# Altium PCB Optocouplers.PcbDoc (part 1 of 2)
Units mm, origin at the board's own origin, x right, y up, seen from the top; angles counter-clockwise.
Board outline 43.2 x 24.15 mm, 4 copper layers (Top Layer, Layer 1, Layer 2, Bottom Layer), stack 1.553 mm thick; 116 components, 82 nets, 391 pads, 180 vias.
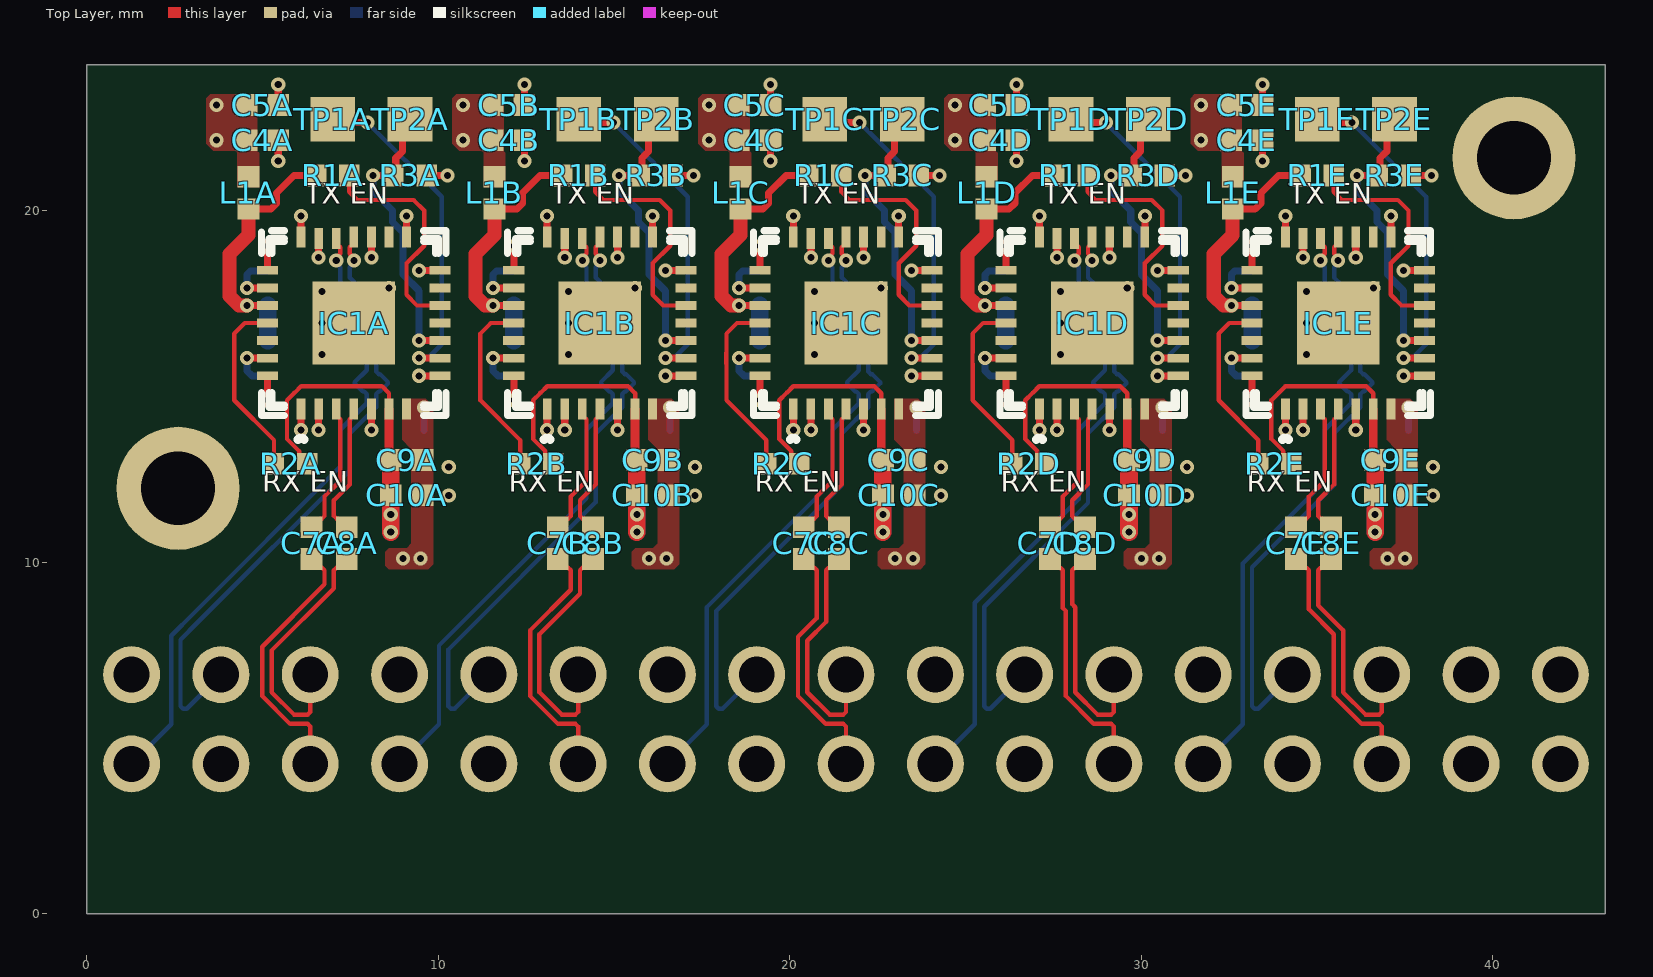
[diagram p0: Top Layer view]
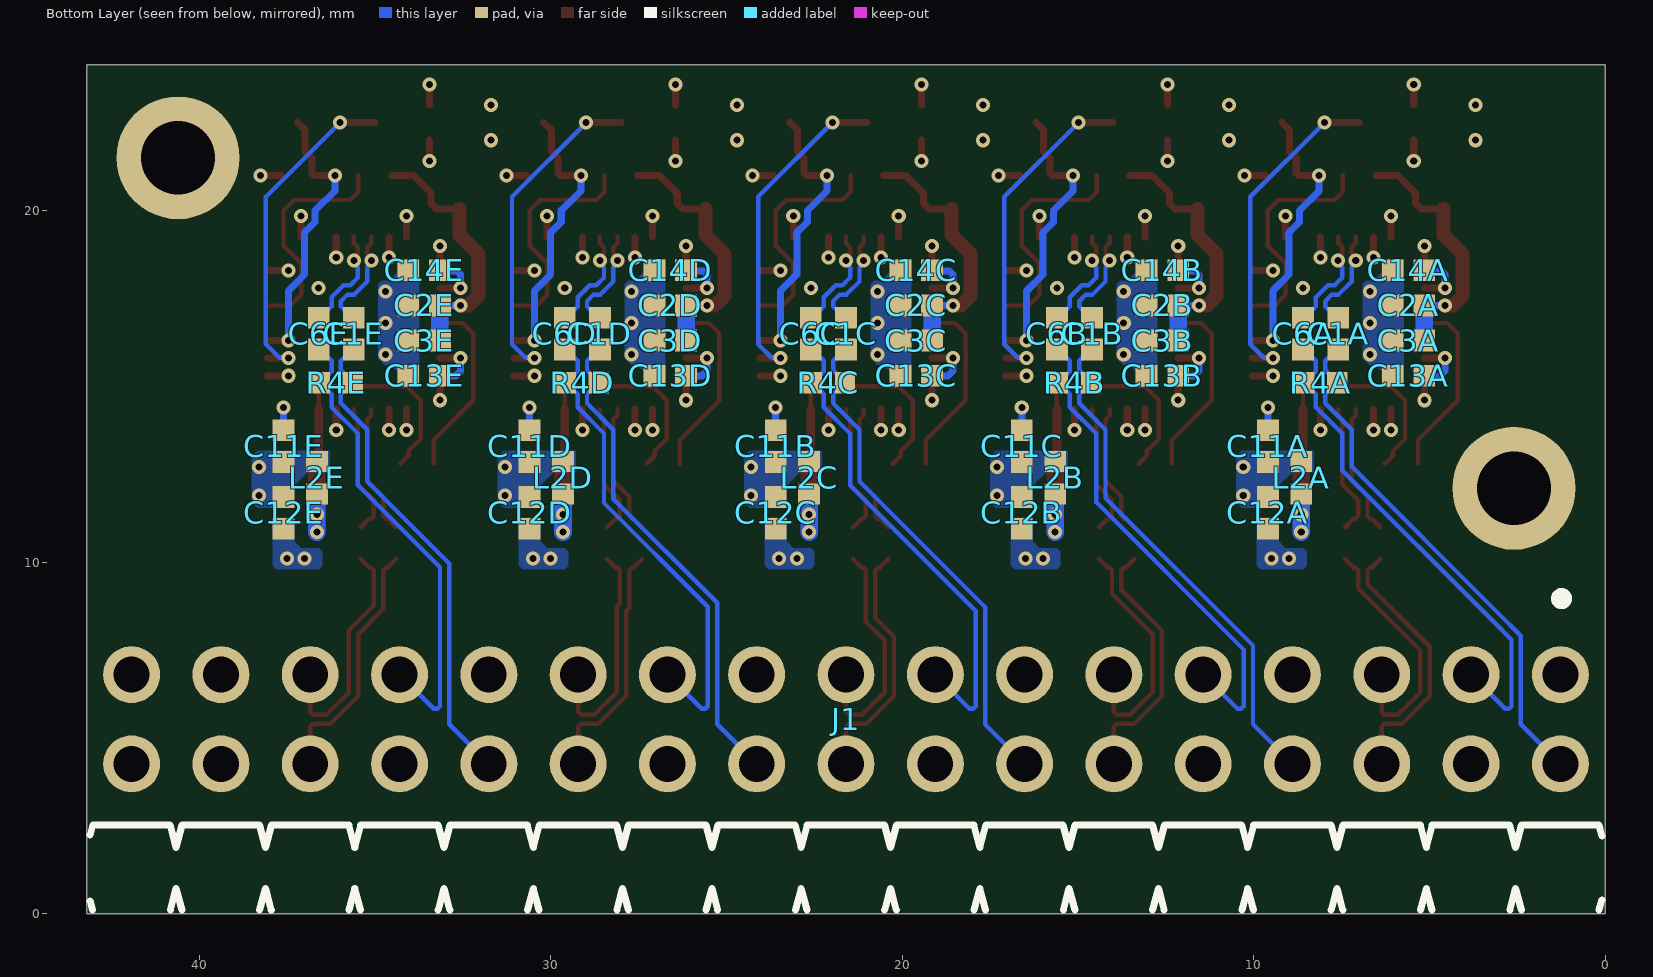
[diagram p1: Bottom Layer view, seen from below]
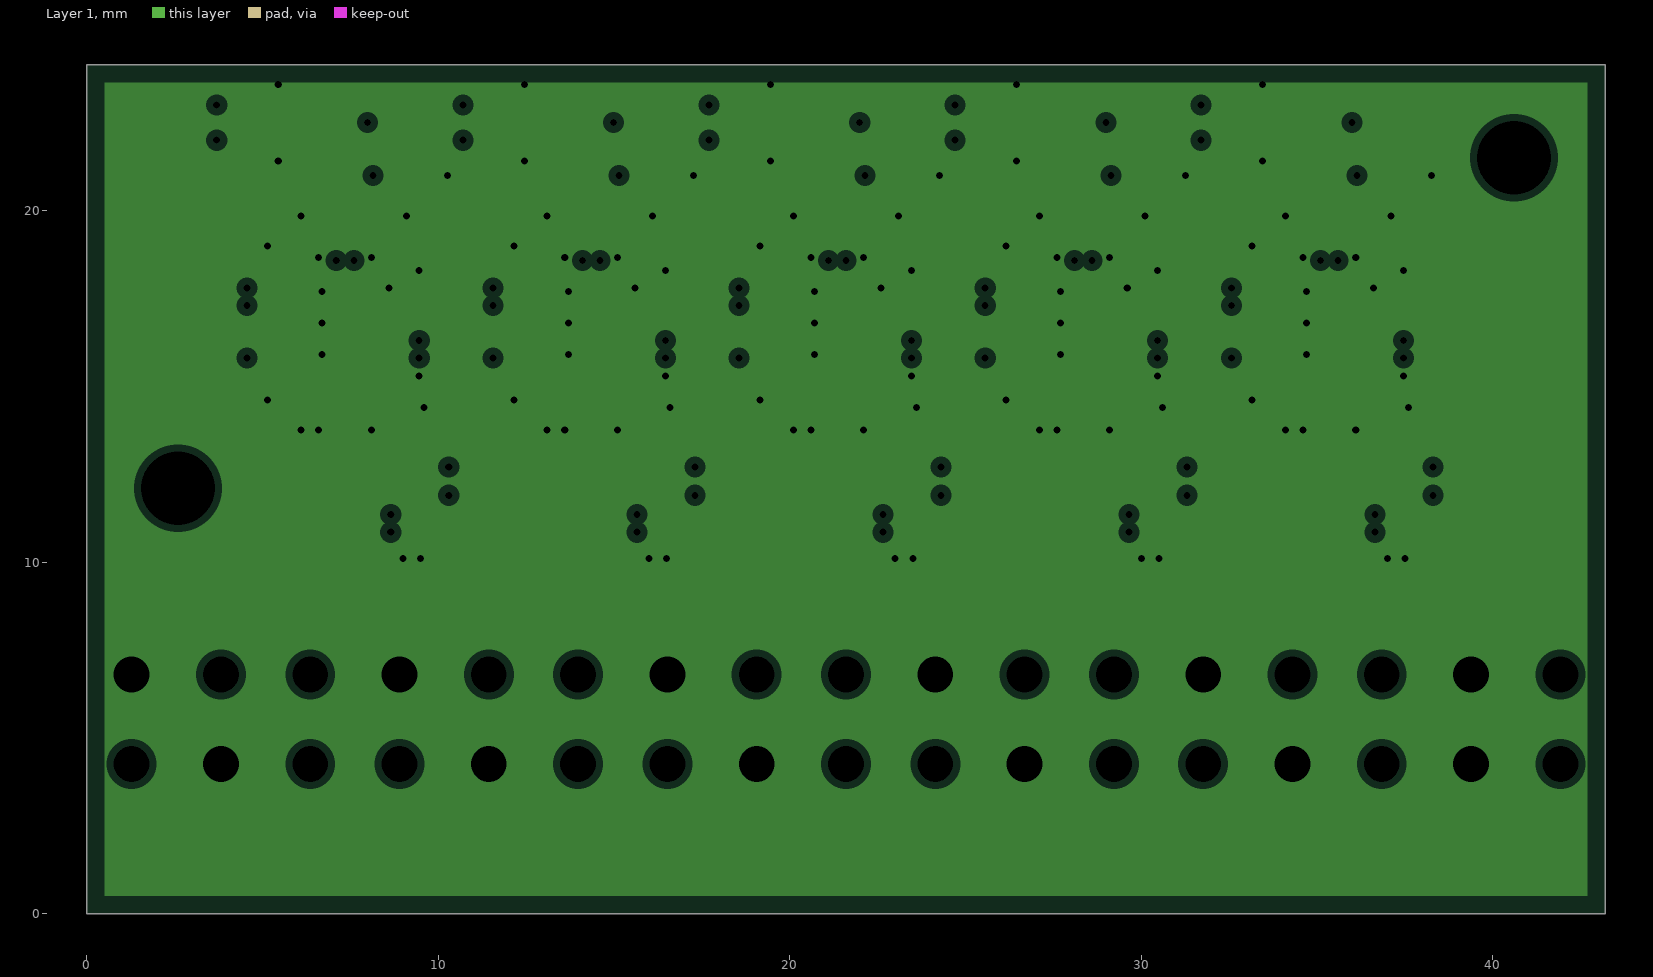
[diagram p2: Layer 1, clearances drawn from the general rule]
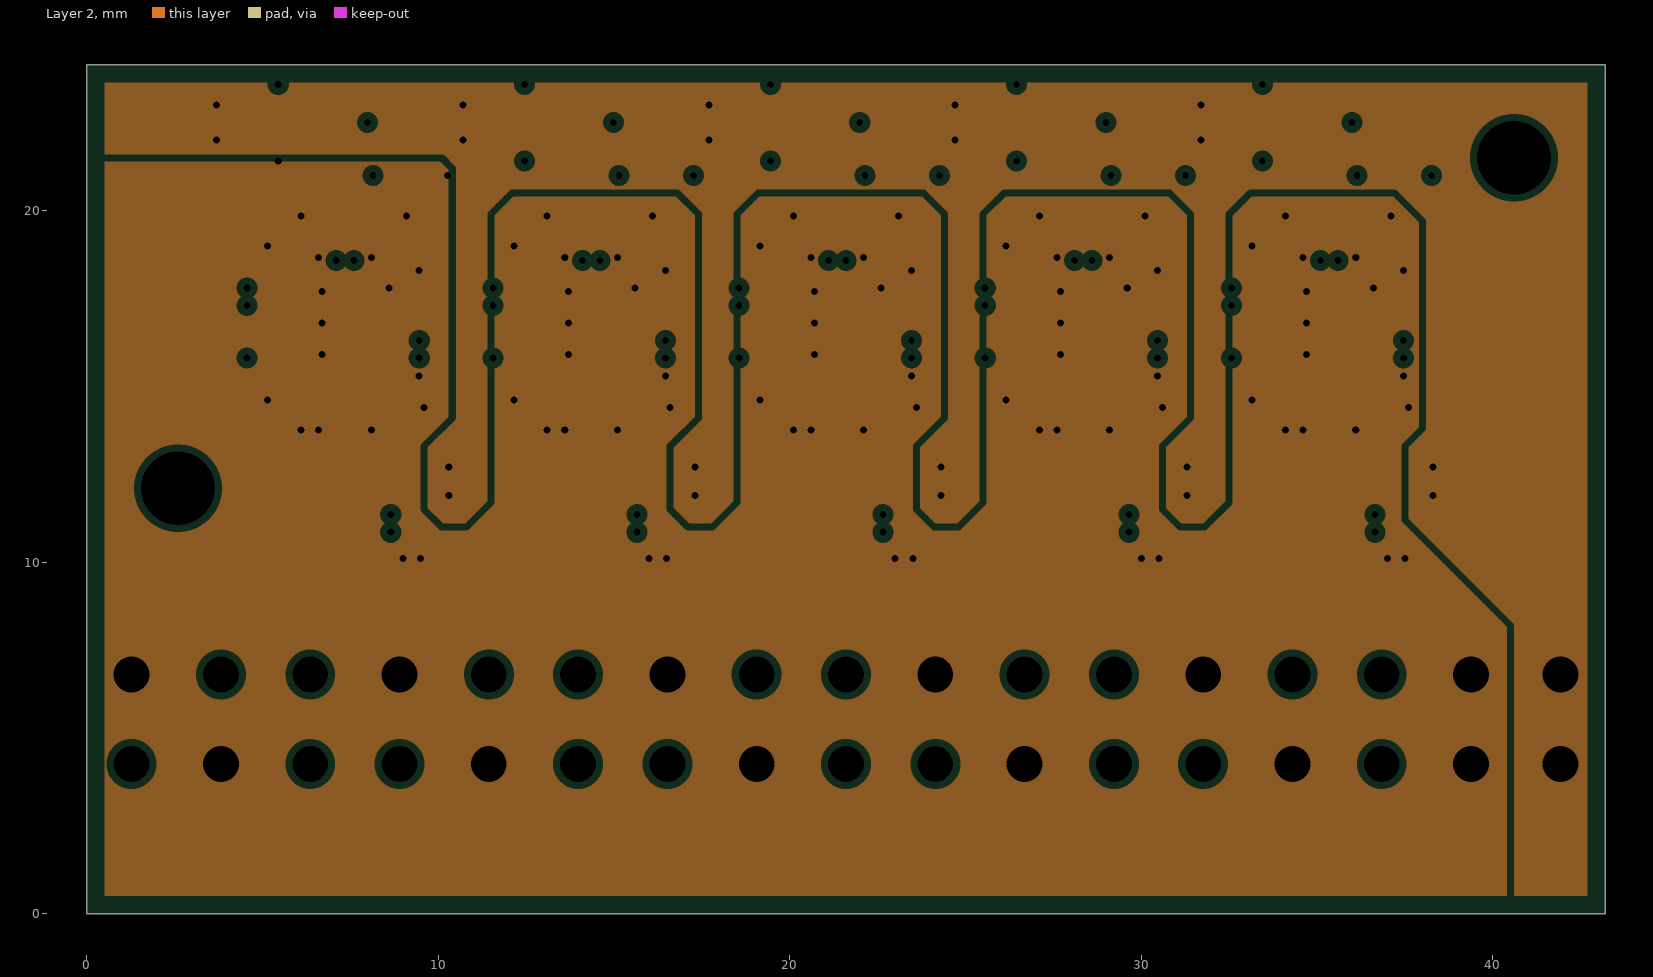
[diagram p3: Layer 2, clearances drawn from the general rule]
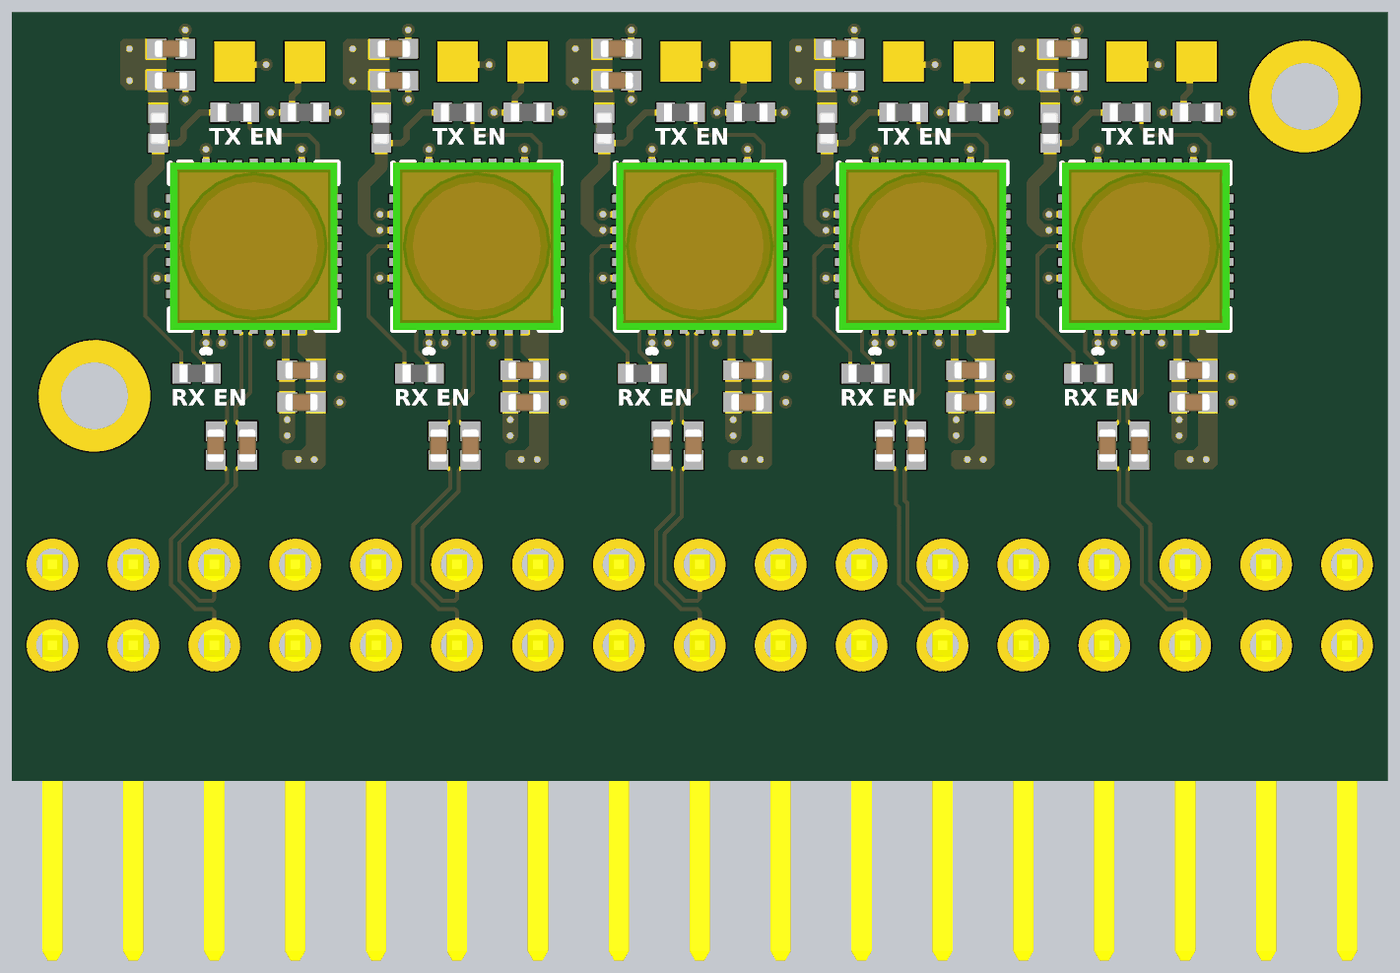
[diagram p5: 3D render of the assembled board from above, using the file's embedded part models]
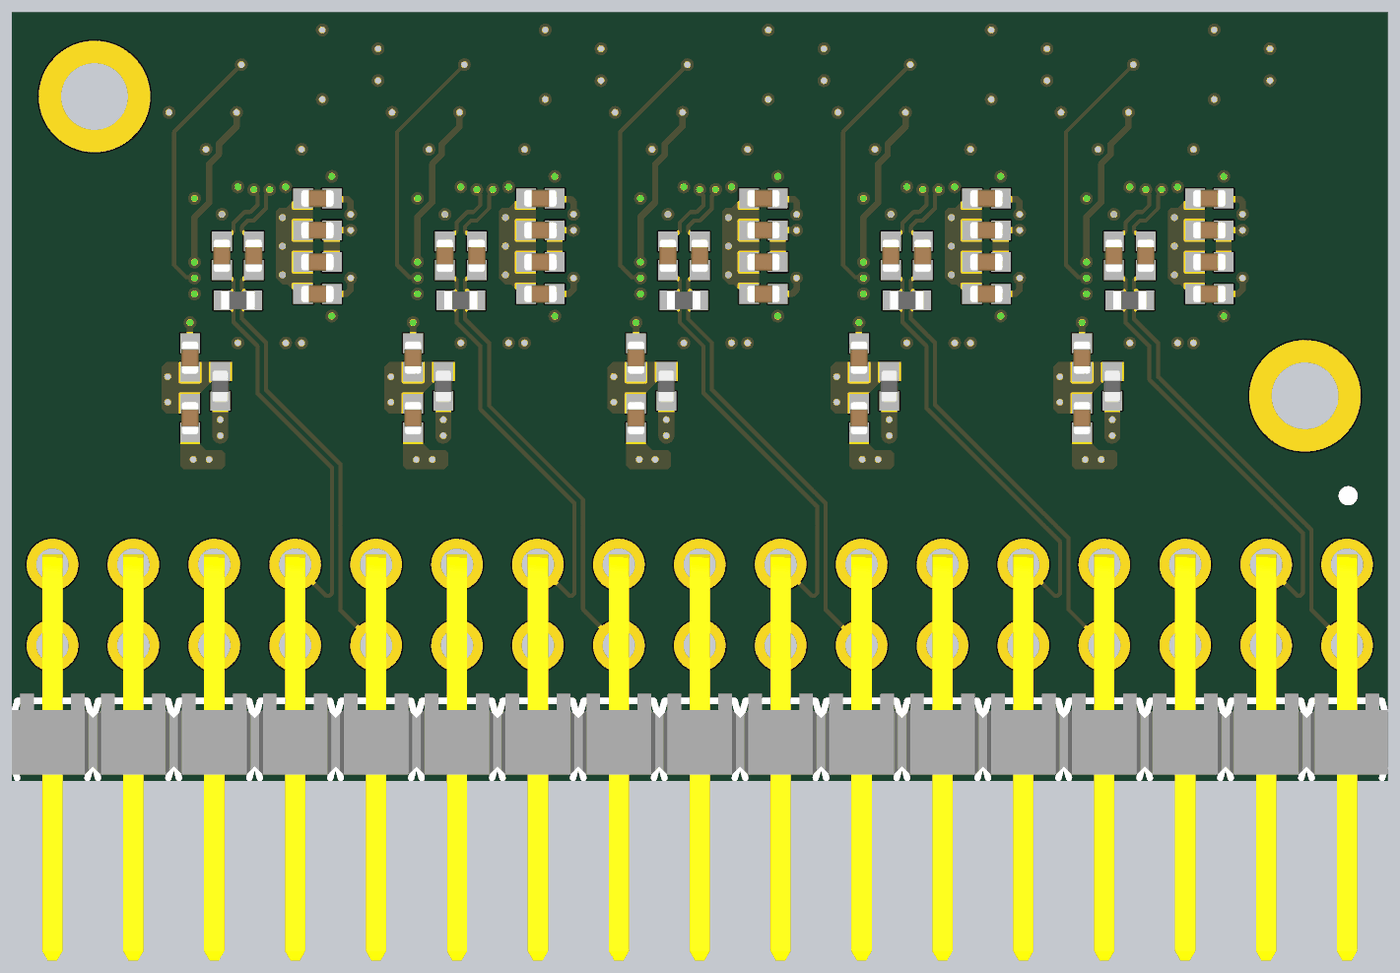
[diagram p6: 3D render of the assembled board from below, using the file's embedded part models]

## Layer stack, top to bottom
Top Solder: solder mask 0.025, Solder Resist, Dk 3.7
Top Layer: signal copper 0.04
Prepreg 1: prepreg 0.0681, PP-006, Dk 4.3
Prepreg 2: prepreg 0.0681, PP-006, Dk 4.3
Layer 1: plane copper 0.035, net GND
Core: dielectric 1.13, FR-4, Dk 4.6
Layer 2: plane copper 0.035, net GND
Prepreg 3: prepreg 0.0681, PP-006, Dk 4.3
Prepreg 4: prepreg 0.0681, PP-006, Dk 4.3
Bottom Layer: signal copper 0.04
Bottom Solder: solder mask 0.025, Solder Resist, Dk 3.7

## Board outline
0,0 0,24.15 43.2,24.15 43.2,0

## Design rules (kind name [scope] priority, off if disabled: settings)
Clearance [All] p1: gap=0.1 ignorepadtopadclearanceinfootprint=FALSE
DiffPairsRouting [All] p1: maxlimit=0.14 minlimit=0.14 mostfreqgap=0.14 toplayer_minwidth=0.125 toplayer_maxwidth=0.125 toplayer_prefwidth=0.125 bottomlayer_minwidth=0.125 bottomlayer_maxwidth=0.125 bottomlayer_prefwidth=0.125 impedanceprofiledriven=TRUE impedanceprofileid={B02402C6-B621-4C1F-966D-6B71089D347F} impedanceprofilevalue=100.000000 maxuncoupledlength=12.7
MinimumSolderMaskSliver [All] p1: minsoldermaskwidth=0.1
PlaneClearance [All] p1: clearance=0.2
PlaneConnect [All] p1: planeconnectstyle=Direct reliefexpansion=0.508 reliefentries=4 reliefconductorwidth=0.254 reliefairgap=0.254
PolygonConnect [All] p1: connectstyle=Direct reliefconductorwidth=0.254 reliefentries=4 polygonreliefangle="90 Angle" airgapwidth=0.254
RoutingVias [All] p1: holewidth=0.2 width=0.4 viastyle="Through Hole" minholewidth=0.2 minwidth=0.4 maxholewidth=0.711 maxwidth=1.27
SolderMaskExpansion [All] p1: expansion=0.05 istentingtop=FALSE
SupplyNets "Schematic Supply Nets_1" [InNet('P3V3')] p1: voltage=0.000
SupplyNets "Schematic Supply Nets" [InNet('GND')] p2: voltage=0.000
Width [All] p1: maxlimit=3 minlimit=0.1 preferedwidth=0.1
26 further rules are at their usual default settings.

## Classes and differential pairs
component class Optocoupler_module: J1
component class U_Optocoupler5: C1E C2E C3E C4E C5E C6E C7E C8E C9E C10E C11E C12E C13E C14E IC1E L1E L2E R1E R2E R3E R4E TP1E TP2E
channel class Optocoupler: U_Optocoupler1 U_Optocoupler2 U_Optocoupler3 U_Optocoupler4 U_Optocoupler5
net class D100: RX_1_N RX_1_P RX_2_N RX_2_P RX_3_N RX_3_P RX_4_N RX_4_P RX_5_N RX_5_P RX_CA_N RX_CA_P RX_CB_N RX_CB_P RX_CC_N RX_CC_P RX_CD_N RX_CD_P RX_CE_N RX_CE_P TX_1_N TX_1_P TX_2_N TX_2_P TX_3_N TX_3_P TX_4_N TX_4_P TX_5_N TX_5_P TX_CA_N TX_CA_P TX_CB_N TX_CB_P TX_CC_N TX_CC_P TX_CD_N TX_CD_P TX_CE_N TX_CE_P
component class U_Optocoupler2: C1B C2B C3B C4B C5B C6B C7B C8B C9B C10B C11B C12B C13B C14B IC1B L1B L2B R1B R2B R3B R4B TP1B TP2B
component class U_Optocoupler4: C1D C2D C3D C4D C5D C6D C7D C8D C9D C10D C11D C12D C13D C14D IC1D L1D L2D R1D R2D R3D R4D TP1D TP2D
component class U_Optocoupler3: C1C C2C C3C C4C C5C C6C C7C C8C C9C C10C C11C C12C C13C C14C IC1C L1C L2C R1C R2C R3C R4C TP1C TP2C
component class U_Optocoupler1: C1A C2A C3A C4A C5A C6A C7A C8A C9A C10A C11A C12A C13A C14A IC1A L1A L2A R1A R2A R3A R4A TP1A TP2A
differential pair TX_5: +TX_5_P -TX_5_N
differential pair TX_4: +TX_4_P -TX_4_N
differential pair TX_3: +TX_3_P -TX_3_N
differential pair TX_2: +TX_2_P -TX_2_N
differential pair TX_1: +TX_1_P -TX_1_N
differential pair RX_5: +RX_5_P -RX_5_N
differential pair RX_4: +RX_4_P -RX_4_N
differential pair RX_3: +RX_3_P -RX_3_N
differential pair RX_2: +RX_2_P -RX_2_N
differential pair RX_1: +RX_1_P -RX_1_N
differential pair TX_CE: +TX_CB_P -TX_CB_N
differential pair TX_CD: +TX_CC_P -TX_CC_N
differential pair TX_CC: +TX_CD_P -TX_CD_N
differential pair TX_CB: +TX_CA_P -TX_CA_N
differential pair TX_CA: +TX_CE_P -TX_CE_N
differential pair RX_CE: +RX_CB_P -RX_CB_N
differential pair RX_CD: +RX_CC_P -RX_CC_N
differential pair RX_CC: +RX_CD_P -RX_CD_N
differential pair RX_CB: +RX_CA_P -RX_CA_N
differential pair RX_CA: +RX_CE_P -RX_CE_N

## Components (designator, comment, footprint, x,y, rotation, side; value= is the part's Value field where it differs from the comment)
C1A "100nF" CAPC1005X55N 7.6,16.5 r270 bottom (schematic designator C1)
C1B "100nF" CAPC1005X55N 14.6,16.5 r270 bottom (schematic designator C1)
C1C "100nF" CAPC1005X55N 21.6,16.5 r270 bottom (schematic designator C1)
C1D "100nF" CAPC1005X55N 28.6,16.5 r270 bottom (schematic designator C1)
C1E "100nF" CAPC1005X55N 35.6,16.5 r270 bottom (schematic designator C1)
C2A "100nF" CAPC1005X55N 5.6,17.3 r180 bottom (schematic designator C2)
C2B "100nF" CAPC1005X55N 12.6,17.3 r180 bottom (schematic designator C2)
C2C "100nF" CAPC1005X55N 19.6,17.3 r180 bottom (schematic designator C2)
C2D "100nF" CAPC1005X55N 26.6,17.3 r180 bottom (schematic designator C2)
C2E "100nF" CAPC1005X55N 33.6,17.3 r180 bottom (schematic designator C2)
C3A "10uF" CAPC1005X55N 5.6,16.3 r180 bottom (schematic designator C3)
C3B "10uF" CAPC1005X55N 12.6,16.3 r180 bottom (schematic designator C3)
C3C "10uF" CAPC1005X55N 19.6,16.3 r180 bottom (schematic designator C3)
C3D "10uF" CAPC1005X55N 26.6,16.3 r180 bottom (schematic designator C3)
C3E "10uF" CAPC1005X55N 33.6,16.3 r180 bottom (schematic designator C3)
C4A "100nF" CAPC1005X55N 5,22 r180 top (schematic designator C4)
C4B "100nF" CAPC1005X55N 12,22 r180 top (schematic designator C4)
C4C "100nF" CAPC1005X55N 19,22 r180 top (schematic designator C4)
C4D "100nF" CAPC1005X55N 26,22 r180 top (schematic designator C4)
C4E "100nF" CAPC1005X55N 33,22 r180 top (schematic designator C4)
C5A "10uF" CAPC1005X55N 5,23 r180 top (schematic designator C5)
C5B "10uF" CAPC1005X55N 12,23 r180 top (schematic designator C5)
C5C "10uF" CAPC1005X55N 19,23 r180 top (schematic designator C5)
C5D "10uF" CAPC1005X55N 26,23 r180 top (schematic designator C5)
C5E "10uF" CAPC1005X55N 33,23 r180 top (schematic designator C5)
C6A "100nF" CAPC1005X55N 8.6,16.5 r270 bottom (schematic designator C6)
C6B "100nF" CAPC1005X55N 15.6,16.5 r270 bottom (schematic designator C6)
C6C "100nF" CAPC1005X55N 22.6,16.5 r270 bottom (schematic designator C6)
C6D "100nF" CAPC1005X55N 29.6,16.5 r270 bottom (schematic designator C6)
C6E "100nF" CAPC1005X55N 36.6,16.5 r270 bottom (schematic designator C6)
C7A "100nF" CAPC1005X55N 6.4,10.54 r270 top (schematic designator C7)
C7B "100nF" CAPC1005X55N 13.4,10.54 r270 top (schematic designator C7)
C7C "100nF" CAPC1005X55N 20.4,10.54 r270 top (schematic designator C7)
C7D "100nF" CAPC1005X55N 27.4,10.54 r270 top (schematic designator C7)
C7E "100nF" CAPC1005X55N 34.4,10.54 r270 top (schematic designator C7)
C8A "100nF" CAPC1005X55N 7.4,10.54 r270 top (schematic designator C8)
C8B "100nF" CAPC1005X55N 14.4,10.54 r270 top (schematic designator C8)
C8C "100nF" CAPC1005X55N 21.4,10.54 r270 top (schematic designator C8)
C8D "100nF" CAPC1005X55N 28.4,10.54 r270 top (schematic designator C8)
C8E "100nF" CAPC1005X55N 35.4,10.54 r270 top (schematic designator C8)
C9A "100nF" CAPC1005X55N 9.1,12.9 r180 top (schematic designator C9)
C9B "100nF" CAPC1005X55N 16.1,12.9 r180 top (schematic designator C9)
C9C "100nF" CAPC1005X55N 23.1,12.9 r180 top (schematic designator C9)
C9D "100nF" CAPC1005X55N 30.1,12.9 r180 top (schematic designator C9)
C9E "100nF" CAPC1005X55N 37.1,12.9 r180 top (schematic designator C9)
C10A "10uF" CAPC1005X55N 9.1,11.9 r180 top (schematic designator C10)
C10B "10uF" CAPC1005X55N 16.1,11.9 r180 top (schematic designator C10)
C10C "10uF" CAPC1005X55N 23.1,11.9 r180 top (schematic designator C10)
C10D "10uF" CAPC1005X55N 30.1,11.9 r180 top (schematic designator C10)
C10E "10uF" CAPC1005X55N 37.1,11.9 r180 top (schematic designator C10)
C11A "100nF" CAPC1005X55N 9.6,13.3 r270 bottom (schematic designator C11)
C11B "100nF" CAPC1005X55N 23.6,13.3 r270 bottom (schematic designator C11)
C11C "100nF" CAPC1005X55N 16.6,13.3 r270 bottom (schematic designator C11)
C11D "100nF" CAPC1005X55N 30.6,13.3 r270 bottom (schematic designator C11)
C11E "100nF" CAPC1005X55N 37.6,13.3 r270 bottom (schematic designator C11)
C12A "10uF" CAPC1005X55N 9.6,11.4 r90 bottom (schematic designator C12)
C12B "10uF" CAPC1005X55N 16.6,11.4 r90 bottom (schematic designator C12)
C12C "10uF" CAPC1005X55N 23.6,11.4 r90 bottom (schematic designator C12)
C12D "10uF" CAPC1005X55N 30.6,11.4 r90 bottom (schematic designator C12)
C12E "10uF" CAPC1005X55N 37.6,11.4 r90 bottom (schematic designator C12)
C13A "100nF" CAPC1005X55N 5.6,15.3 r180 bottom (schematic designator C13)
C13B "100nF" CAPC1005X55N 12.6,15.3 r180 bottom (schematic designator C13)
C13C "100nF" CAPC1005X55N 19.6,15.3 r180 bottom (schematic designator C13)
C13D "100nF" CAPC1005X55N 26.6,15.3 r180 bottom (schematic designator C13)
C13E "100nF" CAPC1005X55N 33.6,15.3 r180 bottom (schematic designator C13)
C14A "100nF" CAPC1005X55N 5.6,18.3 r180 bottom (schematic designator C14)
C14B "100nF" CAPC1005X55N 12.6,18.3 r180 bottom (schematic designator C14)
C14C "100nF" CAPC1005X55N 19.6,18.3 r180 bottom (schematic designator C14)
C14D "100nF" CAPC1005X55N 26.6,18.3 r180 bottom (schematic designator C14)
C14E "100nF" CAPC1005X55N 33.6,18.3 r180 bottom (schematic designator C14)
IC1A "AFBR-FS50B00" BROADCOM_AFBR-FS50B00 7.6,16.8 r90 top (schematic designator IC1)
IC1B "AFBR-FS50B00" BROADCOM_AFBR-FS50B00 14.6,16.8 r90 top (schematic designator IC1)
IC1C "AFBR-FS50B00" BROADCOM_AFBR-FS50B00 21.6,16.8 r90 top (schematic designator IC1)
IC1D "AFBR-FS50B00" BROADCOM_AFBR-FS50B00 28.6,16.8 r90 top (schematic designator IC1)
IC1E "AFBR-FS50B00" BROADCOM_AFBR-FS50B00 35.6,16.8 r90 top (schematic designator IC1)
J1 "TSW" SAMTEC_SW-117-08 1.28,6.8 r0 bottom locked
L1A "1uH" INDC1005X55N 4.6,20.5 r90 top (schematic designator L1)
L1B "1uH" INDC1005X55N 11.6,20.5 r90 top (schematic designator L1)
L1C "1uH" INDC1005X55N 18.6,20.5 r90 top (schematic designator L1)
L1D "1uH" INDC1005X55N 25.6,20.5 r90 top (schematic designator L1)
L1E "1uH" INDC1005X55N 32.6,20.5 r90 top (schematic designator L1)
L2A "1uH" INDC1005X55N 8.65,12.4 r90 bottom (schematic designator L2)
L2B "1uH" INDC1005X55N 15.65,12.4 r90 bottom (schematic designator L2)
L2C "1uH" INDC1005X55N 22.65,12.4 r90 bottom (schematic designator L2)
L2D "1uH" INDC1005X55N 29.65,12.4 r90 bottom (schematic designator L2)
L2E "1uH" INDC1005X55N 36.65,12.4 r90 bottom (schematic designator L2)
R1A "0" RESC1005X40N 7,21 r0 top (schematic designator R1)
R1B "0" RESC1005X40N 14,21 r0 top (schematic designator R1)
R1C "0" RESC1005X40N 21,21 r0 top (schematic designator R1)
R1D "0" RESC1005X40N 28,21 r0 top (schematic designator R1)
R1E "0" RESC1005X40N 35,21 r0 top (schematic designator R1)
R2A "0" RESC1005X40N 5.8,12.8 r180 top (schematic designator R2)
R2B "0" RESC1005X40N 12.8,12.8 r180 top (schematic designator R2)
R2C "0" RESC1005X40N 19.8,12.8 r180 top (schematic designator R2)
R2D "0" RESC1005X40N 26.8,12.8 r180 top (schematic designator R2)
R2E "0" RESC1005X40N 33.8,12.8 r180 top (schematic designator R2)
R3A "1k" RESC1005X40N 9.2,21 r180 top (schematic designator R3)
R3B "1k" RESC1005X40N 16.2,21 r180 top (schematic designator R3)
R3C "1k" RESC1005X40N 23.2,21 r180 top (schematic designator R3)
R3D "1k" RESC1005X40N 30.2,21 r180 top (schematic designator R3)
R3E "1k" RESC1005X40N 37.2,21 r180 top (schematic designator R3)
R4A "100" RESC1005X40N 8.1,15.1 r180 bottom (schematic designator R4)
R4B "100" RESC1005X40N 15.1,15.1 r180 bottom (schematic designator R4)
R4C "100" RESC1005X40N 22.1,15.1 r180 bottom (schematic designator R4)
R4D "100" RESC1005X40N 29.1,15.1 r180 bottom (schematic designator R4)
R4E "100" RESC1005X40N 36.1,15.1 r180 bottom (schematic designator R4)
TP1A "Test Point" TPS127 7,22.6 r90 top (schematic designator TP1)
TP1B "Test Point" TPS127 14,22.6 r90 top (schematic designator TP1)
TP1C "Test Point" TPS127 21,22.6 r90 top (schematic designator TP1)
TP1D "Test Point" TPS127 28,22.6 r90 top (schematic designator TP1)
TP1E "Test Point" TPS127 35,22.6 r90 top (schematic designator TP1)
TP2A "Test Point" TPS127 9.2,22.6 r90 top (schematic designator TP2)
TP2B "Test Point" TPS127 16.2,22.6 r90 top (schematic designator TP2)
TP2C "Test Point" TPS127 23.2,22.6 r90 top (schematic designator TP2)
TP2D "Test Point" TPS127 30.2,22.6 r90 top (schematic designator TP2)
TP2E "Test Point" TPS127 37.2,22.6 r90 top (schematic designator TP2)

## Footprints (in the part's own frame and the unit in brackets; to place one, negate y for a bottom-side part, rotate by r counter-clockwise, add the part's x,y. Pads: shape width x height; smd on the part's side, far side on the other; paste and mask are expansions set on the pad)
BROADCOM_AFBR-FS50B00 [mm] "SOIC, 1.27mm Pitch; 6 Pin, 6.81mm W X4.58mm L X 3.307mm H Body, BROADCOM ACPL-P347"
  rect 0.6x0.25 smd: 1(-2.45,1.5) 2(-2.45,1) 3(-2.45,0.5) 4(-2.45,0) 5(-2.45,-0.5) 6(-2.45,-1) 7(-2.45,-1.5) 15(2.45,-1.5) 16(2.45,-1) 17(2.45,-0.5) 18(2.45,0) 19(2.4,0.5) 20(2.4,1) 21(2.45,1.5)
  rect 0.25x0.6 smd: 8(-1.5,-2.45) 9(-1,-2.45) 10(-0.5,-2.45) 11(0,-2.45) 12(0.5,-2.45) 13(1,-2.45) 14(1.5,-2.45) 22(1.5,2.45) 23(1,2.45) 24(0.5,2.45) 25(0,2.45) 26(-0.5,2.45) 27(-1,2.45) 28(-1.5,2.45)
  rect 2.35x2.35 smd: 29(0,0)
  silkscreen extent -3.31,-2.63 2.63,2.63, body extent -2.63,-2.63 2.63,2.63, height 4.86
CAPC1005X55N [mm] "Capacitor, Non-Polarized, Chip; 1.00mm L X 0.50mm W X 0.70mm H, IPC Medium Density"
  rect 0.62x0.62 smd: 1(-0.45,0) 2(0.45,0)
  body extent -0.52,-0.27 0.53,0.28, height 0.55
INDC1005X55N [mm] "Chip Inductor, 2-Leads, EIA 0402, Metric 1005, Body 1x0.5mm, 0402IPC Medium Density"
  rect 0.6x0.62 smd: 1(-0.46,0) 2(0.46,0)
  body extent -0.52,-0.27 0.53,0.28, height 0.55
RESC1005X40N [mm] "Chip Resistor, EIA 0402, Metric 1005, Body 1.0x0.5mm, IPC Medium Density"
  rect 0.58x0.62 smd: 1(-0.47,0) 2(0.47,0)
  body extent -0.52,-0.27 0.53,0.28, height 0.4
SAMTEC_SW-117-08 [mm] "Classic PCB Header Strips, 0.100\" pitch"
  round 1.62 hole 1.02: 1(0,0) 2(0,2.54) 3(2.54,0) 4(2.54,2.54) 5(5.08,0) 6(5.08,2.54) 7(7.62,0) 8(7.62,2.54) 9(10.16,0) 10(10.16,2.54) 11(12.7,0) 12(12.7,2.54) 13(15.24,0) 14(15.24,2.54) 15(17.78,0) 16(17.78,2.54) 17(20.32,0) 18(20.32,2.54) 19(22.86,0) 20(22.86,2.54) 21(25.4,0) 22(25.4,2.54) 23(27.94,0) 24(27.94,2.54) 25(30.48,0) 26(30.48,2.54) 27(33.02,0) 28(33.02,2.54) 29(35.56,0) 30(35.56,2.54) 31(38.1,0) 32(38.1,2.54) 33(40.64,0) 34(40.64,2.54)
  silkscreen extent -1.18,-2.31 41.82,6.7, body extent -1.27,-0.33 41.91,12.44, height 5.58
TPS127 [mm] "1.27 x  1.27mm SMD Test Point Area"
  rect 1.27x1.27 smd paste-1.27: 1(0,0)

## Part data
C1A C1B C1C C1D C1E C2A C2B C2C C2D C2E C4A C4B C4C C4D C4E C6A C6B C6C C6D C6E C7A C7B C7C C7D C7E C8A C8B C8C C8D C8E C9A C9B C9C C9D C9E C11A C11B C11C C11D C11E C13A C13B C13C C13D C13E C14A C14B C14C C14D C14E: library part CC0402_100NF_50V_10%_X7R, "Non-polarised capacitor", Case=0402, Manufacturer=GENERIC, Manufacturer1 ComponentHeight=0.55mm, Manufacturer1 Example=MURATA, Manufacturer1 Part Number=GRM155R71H104KE14D, Tolerance=±10%, Voltage=50V, Author="CERN DEM MR", Component Type=Standard, CreateDate=6/30/2017, HelpURL=\\cern.ch\dfs\Applications\Altium\Datasheets\CC0402_MURATA_GRM155R71H104KE14D.pdf, LatestRevisionDate=6/30/2017, Manufacturer Part Number=CC0402_100NF_50V_10%_X7R, Mounted=Yes, Part Description="SMD Multilayer Chip Ceramic Capacitor", Part Number=CC0402_100NF_50V_10%_X7R, Pin Count=2, Sense=No, SMD=Yes, Socket=No, Status=None, TC=X7R
C3A C3B C3C C3D C3E C5A C5B C5C C5D C5E C10A C10B C10C C10D C10E C12A C12B C12C C12D C12E: library part CC0402_10UF_6.3V_20%_X5R, "SMD Mulitlayer Ceramic Chip Capacitor", Case=0402, Manufacturer=GENERIC, Manufacturer 1=Murata, Manufacturer 1 Part Number=GRM155R60J106ME15D, Manufacturer 2=Samsung, Manufacturer 2 Part Number=CL05A106MQ5NUNC, Manufacturer 3=YAGEO, Manufacturer 3 Part Number=CC0402MRX5R5BB106, Tolerance=±20%, Voltage=6.3V, Author="Michal Beldyga", Component Type=Standard, ComponentHeight=0.55mm, CreateDate=10/28/2024, LatestRevisionDate=10/28/2024, Manufacturer Part Number=CC0402_10UF_6.3V_20%_X5R, Part Number=CC0402_10UF_6.3V_20%_X5R, Pin Count=2, SMD=Yes, Status=None, TC=X5R
IC1A IC1B IC1C IC1D IC1E: "High Voltage Galvanic Insulation Link for DC to 5MBaud", Manufacturer=BROADCOM, Author="CERN DEM HF", Bonding=No, Component Type=Standard, ComponentHeight=4.83mm, CreateDate=12/10/2024, Device=AFBR-FS50B00, HelpURL=\\cern.ch\dfs\Applications\Altium\Datasheets\AFBR-FS50B00.pdf, LatestRevisionDate=12/10/2024, Manufacturer Part Number=AFBR-FS50B00, Mounted=Yes, PackageDescription="BROADCOM AFBR-FS50B00 Case, Body 5.25mm L X 5.25mm W X 4.83mm H", Part Description="Transceiver Module Optical 5Gbps 3.3V Surface Mount", Part Number=AFBR-FS50B00, Pin Count=29, PressFit=No, Sense=No, SMD=No, Socket=No
J1: library part TSW-117-08-T-D-RA, "Connector 34 Male", Manufacturer=SAMTEC, Author="Michal Beldyga", Component Type=Standard, ComponentHeight=5.56mm, CreateDate=2/18/2025, Family=TSW, LatestRevisionDate=2/18/2025, Manufacturer Part Number=TSW-117-08-T-D-RA, Part Description="Classic PCB Header Strips, 0.100\" pitch", Part Number=TSW-117-08-T-D-RA, Pin Count=34, PressFit=No, SMD=No, Status=Active
L1A L1B L1C L1D L1E L2A L2B L2C L2D L2E: library part IND0402_1UH_5%_TDK_MLZ1005M1R0WT000, "Inductor", Current=100mA, DC Resistance=350mΩ, Manufacturer=TDK, Manufacturer Part Number=MLZ1005M1R0WT000, Tolerance=±20%, Author="Michal Beldyga", Component Type=Standard, ComponentHeight=0.5mm, CreateDate=2/17/2025, LatestRevisionDate=2/17/2025, Part Description="FIXED IND 1UH 450MA 350 MOHM SMD", Part Number=IND0402_1UH_5%_TDK_MLZ1005M1R0WT000, Pin Count=2, SMD=Yes, Status=Active
R1A R1B R1C R1D R1E R2A R2B R2C R2D R2E: library part R0402_0R_JUMPER, "Resistor", Case=0402, Manufacturer=GENERIC, Manufacturer1 ComponentHeight=0.4mm, Manufacturer1 Example="YAGEO PHYCOMP", Manufacturer1 Part Number=232270591001L, Author="CERN DEM JLC", Component Type=Standard, CreateDate=12/3/2007, HelpURL=\\cern.ch\dfs\Applications\Altium\Datasheets\R0402_Phycomp_RC0402.pdf, LatestRevisionDate=10/17/2012, Manufacturer Part Number=R0402_0R_JUMPER, Mounted=Yes, Part Description="1A (0.05R Max DC Resistance) Zero Ohm Jumper", Part Number=R0402_0R_JUMPER, Pin Count=2, PressFit=No, Sense=No, SMD=Yes, Socket=No, Status="Not Recommended"
R3A R3B R3C R3D R3E: library part R0402_1K_1%_0.0625W_100PPM, "Resistor - 1%", Case=0402, Manufacturer=GENERIC, Manufacturer1 ComponentHeight=0.4mm, Manufacturer1 Example="YAGEO PHYCOMP", Manufacturer1 Part Number=232270671002L, Power=0.0625W, Tolerance=±1%, Author="CERN DEM JLC", Component Type=Standard, CreateDate=12/3/2007, HelpURL=\\cern.ch\dfs\Applications\Altium\Datasheets\R0402_Phycomp_RC0402.pdf, LatestRevisionDate=10/17/2012, Manufacturer Part Number=R0402_1K_1%_0.0625W_100PPM, Mounted=Yes, Part Description="General Purpose Thick Film Chip Resistor", Part Number=R0402_1K_1%_0.0625W_100PPM, Pin Count=2, PressFit=No, Sense=No, SMD=Yes, Socket=No, Status="Not Recommended", TC=±100ppm/°C
R4A R4B R4C R4D R4E: library part R0402_100R_1%_0.1W_100PPM, "Resistor - 1%", Case=0402, Manufacturer=GENERIC, Manufacturer1 ComponentHeight=0.4mm, Manufacturer1 Example=PANASONIC, Manufacturer1 Part Number=ERJ2RKF1000X, Manufacturer Part Number=R0402_100R_1%_0.1W_100PPM_50V, Power=0.1W, Tolerance=±1%, Voltage=50V, Author="CERN DEM JLC", Component Type=Standard, CreateDate=12/12/2013, HelpURL=\\cern.ch\dfs\Applications\Altium\Datasheets\R0402_PANASONIC_ERJ2RK.pdf, LatestRevisionDate=3/3/2015, Mounted=Yes, Part Description="General Purpose Thick Film Chip Resistor", Part Number=R0402_100R_1%_0.1W_100PPM, Pin Count=2, PressFit=No, Sense=No, SMD=Yes, Socket=No, Status="Not Recommended", TC=±100ppm/°C
TP1A TP1B TP1C TP1D TP1E TP2A TP2B TP2C TP2D TP2E: library part SMD_PAD_1.27X1.27MM, Author="CERN DEM JLC", Component Type="Standard (No BOM)", ComponentHeight=0mm, CreateDate=1/12/2008, Family="Test Point", HelpURL=Undefined, LatestRevisionDate=1/12/2008, Mounted=No, PackageDescription="1.27mm x 1.27mm PCB Copper Area (SMD Test Point)", Part Description="1.27mm x 1.27mm PCB Copper Area (SMD Test Point)", Part Number=SMD_PAD_1.27X1.27MM, Pin Count=1, Sense=No, SMD=Yes, Socket=No, Status=None

## Free pads (board coordinates)
  round 3.5 hole 2.1: ""(2.6,12.1) ""(40.6,21.5)

## Via types
v1: diameter 0.4, hole 0.2, Top Layer to Bottom Layer, tented both sides, 180 vias

## Nets (pads, with @x,y where several pads share a name; then routed paths per layer and width w, separated by ;. In a path a pad name is that pad's centre, name@x,y a point inside that pad or via, vN(x,y) a via of type N, cw(c..) or ccw(c..) an arc to the next point about the centre after c; other vN are vias at no path point)
FILTA: C14A.2 IC1A.23 | length 1.6
  Top Layer w0.2: v1(4.56,17.8) IC1A.23@5.15,17.8
  Bottom Layer w0.2: v1(4.56,17.8) 4.56,18.183 4.657,18.28 5.13,18.28 C14A.2@5.15,18.3
FILTB: C14B.2 IC1B.23 | length 1.6
  Top Layer w0.2: v1(11.56,17.8) IC1B.23@12.15,17.8
  Bottom Layer w0.2: v1(11.56,17.8) 11.56,18.183 11.657,18.28 12.13,18.28 C14B.2@12.15,18.3
FILTC: C14C.2 IC1C.23 | length 1.6
  Top Layer w0.2: v1(18.56,17.8) IC1C.23@19.15,17.8
  Bottom Layer w0.2: v1(18.56,17.8) 18.56,18.183 18.657,18.28 19.13,18.28 C14C.2@19.15,18.3
FILTD: C14D.2 IC1D.23 | length 1.6
  Top Layer w0.2: v1(25.56,17.8) IC1D.23@26.15,17.8
  Bottom Layer w0.2: v1(25.56,17.8) 25.56,18.183 25.657,18.28 26.13,18.28 C14D.2@26.15,18.3
FILTE: C14E.2 IC1E.23 | length 1.6
  Top Layer w0.2: v1(32.56,17.8) IC1E.23@33.15,17.8
  Bottom Layer w0.2: v1(32.56,17.8) 32.56,18.183 32.657,18.28 33.13,18.28 C14E.2@33.15,18.3
GND: C2A.1 C2B.1 C2C.1 C2D.1 C2E.1 C3A.1 C3B.1 C3C.1 C3D.1 C3E.1 C4A.1 C4B.1 C4C.1 C4D.1 C4E.1 C5A.1 C5B.1 C5C.1 C5D.1 C5E.1 C9A.1 C9B.1 C9C.1 C9D.1 C9E.1 C10A.1 C10B.1 C10C.1 C10D.1 C10E.1 C11A.1 C11B.1 C11C.1 C11D.1 C11E.1 C12A.1 C12B.1 C12C.1 C12D.1 C12E.1 C13A.1 C13B.1 C13C.1 C13D.1 C13E.1 C14A.1 C14B.1 C14C.1 C14D.1 C14E.1 IC1A.1 IC1A.2 IC1A.5 IC1A.7 IC1A.8 IC1A.14 IC1A.15 IC1A.17 IC1A.20 IC1A.21 IC1A.22 IC1A.28 IC1A.29 IC1B.1 IC1B.2 IC1B.5 IC1B.7 IC1B.8 IC1B.14 IC1B.15 IC1B.17 IC1B.20 IC1B.21 IC1B.22 IC1B.28 IC1B.29 IC1C.1 IC1C.2 IC1C.5 IC1C.7 IC1C.8 IC1C.14 IC1C.15 IC1C.17 IC1C.20 IC1C.21 IC1C.22 IC1C.28 IC1C.29 IC1D.1 IC1D.2 IC1D.5 IC1D.7 IC1D.8 IC1D.14 IC1D.15 IC1D.17 IC1D.20 IC1D.21 IC1D.22 IC1D.28 IC1D.29 IC1E.1 IC1E.2 IC1E.5 IC1E.7 IC1E.8 IC1E.14 IC1E.15 IC1E.17 IC1E.20 IC1E.21 IC1E.22 IC1E.28 IC1E.29 J1.1 J1.4 J1.7 J1.10 J1.13 J1.16 J1.19 J1.22 J1.25 J1.28 J1.31 J1.32 R3A.1 R3B.1 R3C.1 R3D.1 R3E.1 | length 45.6
  Top Layer w0.2: v1(5.15,14.604) IC1A.28@5.15,15.3 ; IC1A.22@5.15,18.3 v1(5.15,18.99) ; v1(5.45,21.41) C4A.1@5.45,22 ; C5A.1@5.45,23 v1(5.45,23.59) ; v1(6.1,13.76) IC1A.1@6.1,14.35 ; IC1A.21@6.1,19.25 v1(6.1,19.84) ; v1(6.6,13.76) IC1A.2@6.6,14.35 ; v1(6.6,18.66) IC1A.20@6.6,19.25 ; v1(8.1,13.76) IC1A.5@8.1,14.35 ; v1(8.1,18.66) IC1A.17@8.1,19.25 ; IC1A.15@9.1,19.25 v1(9.1,19.84) ; v1(9.46,15.3) IC1A.8@10.05,15.3 ; v1(9.46,18.3) IC1A.14@10.05,18.3 ; R3A.1@9.67,21 v1(10.26,21) ; v1(12.15,14.604) IC1B.28@12.15,15.3 ; IC1B.22@12.15,18.3 v1(12.15,18.99) ; v1(12.45,21.41) C4B.1@12.45,22 ; C5B.1@12.45,23 v1(12.45,23.59) ; v1(13.1,13.76) IC1B.1@13.1,14.35 ; IC1B.21@13.1,19.25 v1(13.1,19.84) ; v1(13.6,13.76) IC1B.2@13.6,14.35 ; v1(13.6,18.66) IC1B.20@13.6,19.25 ; v1(15.1,13.76) IC1B.5@15.1,14.35 ; v1(15.1,18.66) IC1B.17@15.1,19.25 ; IC1B.15@16.1,19.25 v1(16.1,19.84) ; v1(16.46,15.3) IC1B.8@17.05,15.3 ; v1(16.46,18.3) IC1B.14@17.05,18.3 ; R3B.1@16.67,21 v1(17.26,21) ; v1(19.15,14.604) IC1C.28@19.15,15.3 ; IC1C.22@19.15,18.3 v1(19.15,18.99) ; v1(19.45,21.41) C4C.1@19.45,22 ; C5C.1@19.45,23 v1(19.45,23.59) ; v1(20.1,13.76) IC1C.1@20.1,14.35 ; IC1C.21@20.1,19.25 v1(20.1,19.84) ; v1(20.6,13.76) IC1C.2@20.6,14.35 ; v1(20.6,18.66) IC1C.20@20.6,19.25 ; v1(22.1,13.76) IC1C.5@22.1,14.35 ; v1(22.1,18.66) IC1C.17@22.1,19.25 ; IC1C.15@23.1,19.25 v1(23.1,19.84) ; v1(23.46,15.3) IC1C.8@24.05,15.3 ; v1(23.46,18.3) IC1C.14@24.05,18.3 ; R3C.1@23.67,21 v1(24.26,21) ; v1(26.15,14.604) IC1D.28@26.15,15.3 ; IC1D.22@26.15,18.3 v1(26.15,18.99) ; v1(26.45,21.41) C4D.1@26.45,22 ; C5D.1@26.45,23 v1(26.45,23.59) ; v1(27.1,13.76) IC1D.1@27.1,14.35 ; IC1D.21@27.1,19.25 v1(27.1,19.84) ; v1(27.6,13.76) IC1D.2@27.6,14.35 ; v1(27.6,18.66) IC1D.20@27.6,19.25 ; v1(29.1,13.76) IC1D.5@29.1,14.35 ; v1(29.1,18.66) IC1D.17@29.1,19.25 ; IC1D.15@30.1,19.25 v1(30.1,19.84) ; v1(30.46,15.3) IC1D.8@31.05,15.3 ; v1(30.46,18.3) IC1D.14@31.05,18.3 ; R3D.1@30.67,21 v1(31.26,21) ; v1(33.15,14.604) IC1E.28@33.15,15.3 ; IC1E.22@33.15,18.3 v1(33.15,18.99) ; v1(33.45,21.41) C4E.1@33.45,22 ; C5E.1@33.45,23 v1(33.45,23.59) ; v1(34.1,13.76) IC1E.1@34.1,14.35 ; IC1E.21@34.1,19.25 v1(34.1,19.84) ; v1(34.6,13.76) IC1E.2@34.6,14.35 ; v1(34.6,18.66) IC1E.20@34.6,19.25 ; v1(36.1,13.76) IC1E.5@36.1,14.35 ; v1(36.1,18.66) IC1E.17@36.1,19.25 ; IC1E.15@37.1,19.25 v1(37.1,19.84) ; v1(37.46,15.3) IC1E.8@38.05,15.3 ; v1(37.46,18.3) IC1E.14@38.05,18.3 ; R3E.1@37.67,21 v1(38.26,21)
  Bottom Layer w0.2: C11A.1@9.6,13.75 v1(9.6,14.4) ; C11C.1@16.6,13.75 v1(16.6,14.4) ; C11B.1@23.6,13.75 v1(23.6,14.4) ; C11D.1@30.6,13.75 v1(30.6,14.4) ; C11E.1@37.6,13.75 v1(37.6,14.4)
  other v1: 9,10.1 9.5,10.1 16,10.1 16.5,10.1 23,10.1 23.5,10.1 30,10.1 30.5,10.1 37,10.1 37.5,10.1 6.7,15.9 13.7,15.9 20.7,15.9 27.7,15.9 34.7,15.9 6.7,16.8 13.7,16.8 20.7,16.8 27.7,16.8 34.7,16.8 6.7,17.7 13.7,17.7 20.7,17.7 27.7,17.7 34.7,17.7 8.6,17.8 15.6,17.8 22.6,17.8 29.6,17.8 36.6,17.8
IMONA: IC1A.10 R3A.2 TP2A.1 | length 8.1
  Top Layer w0.2: v1(8.14,21) R3A.2@8.73,21 8.793,21.063 8.793,21.493 8.982,21.682 8.982,22.282 TP2A.1@9.2,22.5 ; v1(9.46,16.3) IC1A.10@10.05,16.3
  Bottom Layer w0.2: v1(8.14,21) 8.14,20.56 8.7,20 8.7,19.674 9,19.374 9,18.177 9.46,17.717 v1(9.46,16.3)
IMONB: IC1B.10 R3B.2 TP2B.1 | length 8.1
  Top Layer w0.2: v1(15.14,21) R3B.2@15.73,21 15.793,21.063 15.793,21.493 15.982,21.682 15.982,22.282 TP2B.1@16.2,22.5 ; v1(16.46,16.3) IC1B.10@17.05,16.3
  Bottom Layer w0.2: v1(15.14,21) 15.14,20.56 15.7,20 15.7,19.674 16,19.374 16,18.177 16.46,17.717 v1(16.46,16.3)
IMONC: IC1C.10 R3C.2 TP2C.1 | length 8.1
  Top Layer w0.2: v1(22.14,21) R3C.2@22.73,21 22.793,21.063 22.793,21.493 22.982,21.682 22.982,22.282 TP2C.1@23.2,22.5 ; v1(23.46,16.3) IC1C.10@24.05,16.3
  Bottom Layer w0.2: v1(22.14,21) 22.14,20.56 22.7,20 22.7,19.674 23,19.374 23,18.177 23.46,17.717 v1(23.46,16.3)
IMOND: IC1D.10 R3D.2 TP2D.1 | length 8.1
  Top Layer w0.2: v1(29.14,21) R3D.2@29.73,21 29.793,21.063 29.793,21.493 29.982,21.682 29.982,22.282 TP2D.1@30.2,22.5 ; v1(30.46,16.3) IC1D.10@31.05,16.3
  Bottom Layer w0.2: v1(29.14,21) 29.14,20.56 29.7,20 29.7,19.674 30,19.374 30,18.177 30.46,17.717 v1(30.46,16.3)
IMONE: IC1E.10 R3E.2 TP2E.1 | length 8.1
  Top Layer w0.2: v1(36.14,21) R3E.2@36.73,21 36.793,21.063 36.793,21.493 36.982,21.682 36.982,22.282 TP2E.1@37.2,22.5 ; v1(37.46,16.3) IC1E.10@38.05,16.3
  Bottom Layer w0.2: v1(36.14,21) 36.14,20.56 36.7,20 36.7,19.674 37,19.374 37,18.177 37.46,17.717 v1(37.46,16.3)
P3V3: C4A.2 C4B.2 C4C.2 C4D.2 C4E.2 C5A.2 C5B.2 C5C.2 C5D.2 C5E.2 C11A.2 C11B.2 C11C.2 C11D.2 C11E.2 C12A.2 C12B.2 C12C.2 C12D.2 C12E.2 J1.33 J1.34 L1A.2 L1B.2 L1C.2 L1D.2 L1E.2 L2A.2 L2B.2 L2C.2 L2D.2 L2E.2
  other v1: 10.3,11.9 17.3,11.9 24.3,11.9 31.3,11.9 38.3,11.9 10.3,12.7 17.3,12.7 24.3,12.7 31.3,12.7 38.3,12.7 3.7,22 10.7,22 17.7,22 24.7,22 31.7,22 3.7,23 10.7,23 17.7,23 24.7,23 31.7,23
RX_1_N: C8A.2 J1.5 | length 7.2
  Top Layer w0.125: J1.5@6.36,6.8 6.36,5.736 6.287,5.663 5.897,5.663 5.26,6.3 5.26,7.485 7.033,9.257 7.033,9.769 7.106,9.843 7.153,9.843 C8A.2@7.4,10.09
RX_1_P: C7A.2 J1.6 | length 7.6
  Top Layer w0.125: J1.6@6.36,4.26 6.36,5.324 6.287,5.397 5.787,5.397 4.995,6.19 4.995,7.296 4.995,7.595 6.767,9.367 6.767,9.769 6.694,9.843 6.647,9.843 C7A.2@6.4,10.09
RX_2_N: C8B.2 J1.11 | length 6.9
  Top Layer w0.125: J1.11@13.98,6.8 13.98,5.736 13.907,5.663 13.517,5.663 12.88,6.3 12.88,7.947 14.033,9.1 14.033,9.769 14.106,9.843 14.153,9.843 C8B.2@14.4,10.09
RX_2_P: C7B.2 J1.12 | length 7.3
  Top Layer w0.125: C7B.2@13.4,10.09 13.647,9.843 13.694,9.843 13.767,9.769 13.767,9.21 12.615,8.057 12.615,6.19 13.407,5.397 13.907,5.397 13.98,5.324 J1.12@13.98,4.26
RX_3_N: C8C.2 J1.17 | length 6.6
  Top Layer w0.125: C8C.2@21.4,10.09 21.153,9.843 21.106,9.843 21.033,9.769 21.033,8.298 20.5,7.765 20.5,6.3 21.137,5.663 21.527,5.663 21.6,5.736 J1.17@21.6,6.8
RX_3_P: C7C.2 J1.18 | length 7.1
  Top Layer w0.125: C7C.2@20.4,10.09 20.647,9.843 20.694,9.843 20.767,9.769 20.767,8.408 20.235,7.875 20.235,6.19 21.027,5.397 21.527,5.397 21.6,5.324 J1.18@21.6,4.26
RX_4_N: C8D.2 J1.23 | length 6.5
  Top Layer w0.125: C8D.2@28.4,10.09 28.153,9.843 28.106,9.843 28.033,9.769 28.033,8.806 28.12,8.718 28.12,6.3 28.757,5.663 29.147,5.663 29.22,5.736 J1.23@29.22,6.8
RX_4_P: C7D.2 J1.24 | length 6.9
  Top Layer w0.125: C7D.2@27.4,10.09 27.647,9.843 27.694,9.843 27.767,9.769 27.767,8.696 27.855,8.608 27.855,6.19 28.647,5.397 29.147,5.397 29.22,5.324 J1.24@29.22,4.26
RX_5_N: C8E.2 J1.29 | length 6.7
  Top Layer w0.125: C8E.2@35.4,10.09 35.153,9.843 35.106,9.843 35.033,9.769 35.033,8.767 35.74,8.06 35.74,6.3 36.377,5.663 36.767,5.663 36.84,5.736 J1.29@36.84,6.8
RX_5_P: C7E.2 J1.30 | length 7.2
  Top Layer w0.125: C7E.2@34.4,10.09 34.647,9.843 34.694,9.843 34.767,9.769 34.767,8.657 35.475,7.95 35.475,6.19 36.267,5.397 36.767,5.397 36.84,5.324 J1.30@36.84,4.26
RX_CA_N: C8A.1 IC1A.4 | length 3.8
  Top Layer w0.125: C8A.1@7.4,10.99 7.153,11.237 7.106,11.237 7.033,11.311 7.033,11.757 7.483,12.207 7.483,14.058 7.6,14.175 IC1A.4@7.6,14.35
RX_CA_P: C7A.1 IC1A.3 | length 3.8
  Top Layer w0.125: C7A.1@6.4,10.99 6.647,11.237 6.694,11.237 6.767,11.311 6.767,11.867 7.217,12.317 7.217,14.058 7.1,14.175 IC1A.3@7.1,14.35
RX_CB_N: C8B.1 IC1B.4 | length 3.8
  Top Layer w0.125: C8B.1@14.4,10.99 14.153,11.237 14.106,11.237 14.033,11.311 14.033,11.757 14.483,12.207 14.483,14.058 14.6,14.175 IC1B.4@14.6,14.35
RX_CB_P: C7B.1 IC1B.3 | length 3.8
  Top Layer w0.125: C7B.1@13.4,10.99 13.647,11.237 13.694,11.237 13.767,11.311 13.767,11.867 14.217,12.317 14.217,14.058 14.1,14.175 IC1B.3@14.1,14.35
RX_CC_N: C8C.1 IC1C.4 | length 3.8
  Top Layer w0.125: C8C.1@21.4,10.99 21.153,11.237 21.106,11.237 21.033,11.311 21.033,11.757 21.483,12.207 21.483,14.058 21.6,14.175 IC1C.4@21.6,14.35
RX_CC_P: C7C.1 IC1C.3 | length 3.8
  Top Layer w0.125: C7C.1@20.4,10.99 20.647,11.237 20.694,11.237 20.767,11.311 20.767,11.867 21.217,12.317 21.217,14.058 21.1,14.175 IC1C.3@21.1,14.35
RX_CD_N: C8D.1 IC1D.4 | length 3.8
  Top Layer w0.125: C8D.1@28.4,10.99 28.153,11.237 28.106,11.237 28.033,11.311 28.033,11.757 28.483,12.207 28.483,14.058 28.6,14.175 IC1D.4@28.6,14.35
RX_CD_P: C7D.1 IC1D.3 | length 3.8
  Top Layer w0.125: C7D.1@27.4,10.99 27.647,11.237 27.694,11.237 27.767,11.311 27.767,11.867 28.217,12.317 28.217,14.058 28.1,14.175 IC1D.3@28.1,14.35
RX_CE_N: C8E.1 IC1E.4 | length 3.8
  Top Layer w0.125: C8E.1@35.4,10.99 35.153,11.237 35.106,11.237 35.033,11.311 35.033,11.757 35.483,12.207 35.483,14.058 35.6,14.175 IC1E.4@35.6,14.35
RX_CE_P: C7E.1 IC1E.3 | length 3.8
  Top Layer w0.125: C7E.1@34.4,10.99 34.647,11.237 34.694,11.237 34.767,11.311 34.767,11.867 35.217,12.317 35.217,14.058 35.1,14.175 IC1E.3@35.1,14.35
RX_ENA: IC1A.25 R2A.2 | length 5.2
  Top Layer w0.125: IC1A.25@5.15,16.8 4.5,16.8 4.2,16.5 4.2,15.953 4.197,15.95 4.197,15.65 4.2,15.647 4.2,14.6 5.33,13.47 R2A.2@5.33,12.8
RX_ENB: IC1B.25 R2B.2 | length 5.2
  Top Layer w0.125: IC1B.25@12.15,16.8 11.5,16.8 11.2,16.5 11.2,15.953 11.198,15.95 11.198,15.65 11.2,15.647 11.2,14.6 12.33,13.47 R2B.2@12.33,12.8
RX_ENC: IC1C.25 R2C.2 | length 5.2
  Top Layer w0.125: IC1C.25@19.15,16.8 18.5,16.8 18.2,16.5 18.2,15.953 18.197,15.95 18.197,15.65 18.2,15.647 18.2,14.6 19.33,13.47 R2C.2@19.33,12.8
RX_END: IC1D.25 R2D.2 | length 5.2
  Top Layer w0.125: IC1D.25@26.15,16.8 25.5,16.8 25.2,16.5 25.2,15.953 25.198,15.95 25.198,15.65 25.2,15.647 25.2,14.6 26.33,13.47 R2D.2@26.33,12.8